# EAGLE board logic (EAGLE 9.6.2)
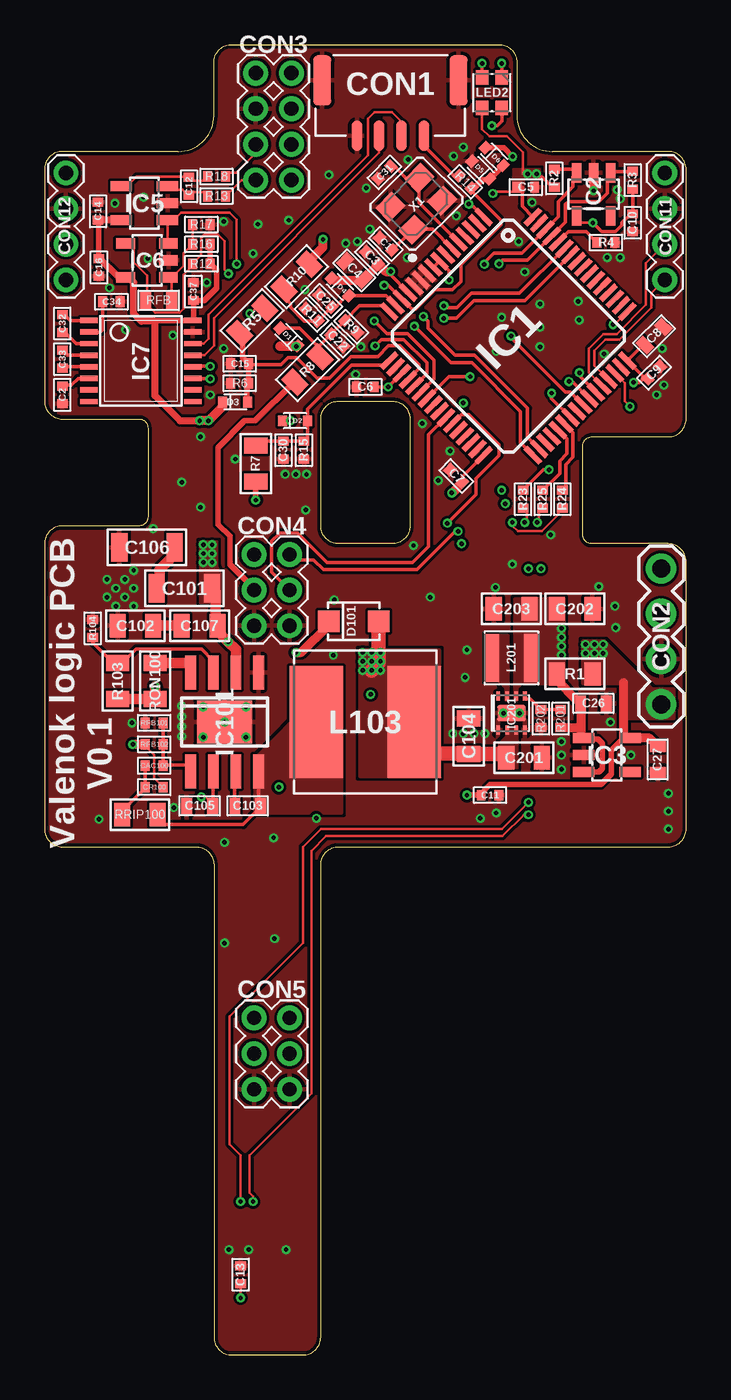
[diagram p0: board, top side]
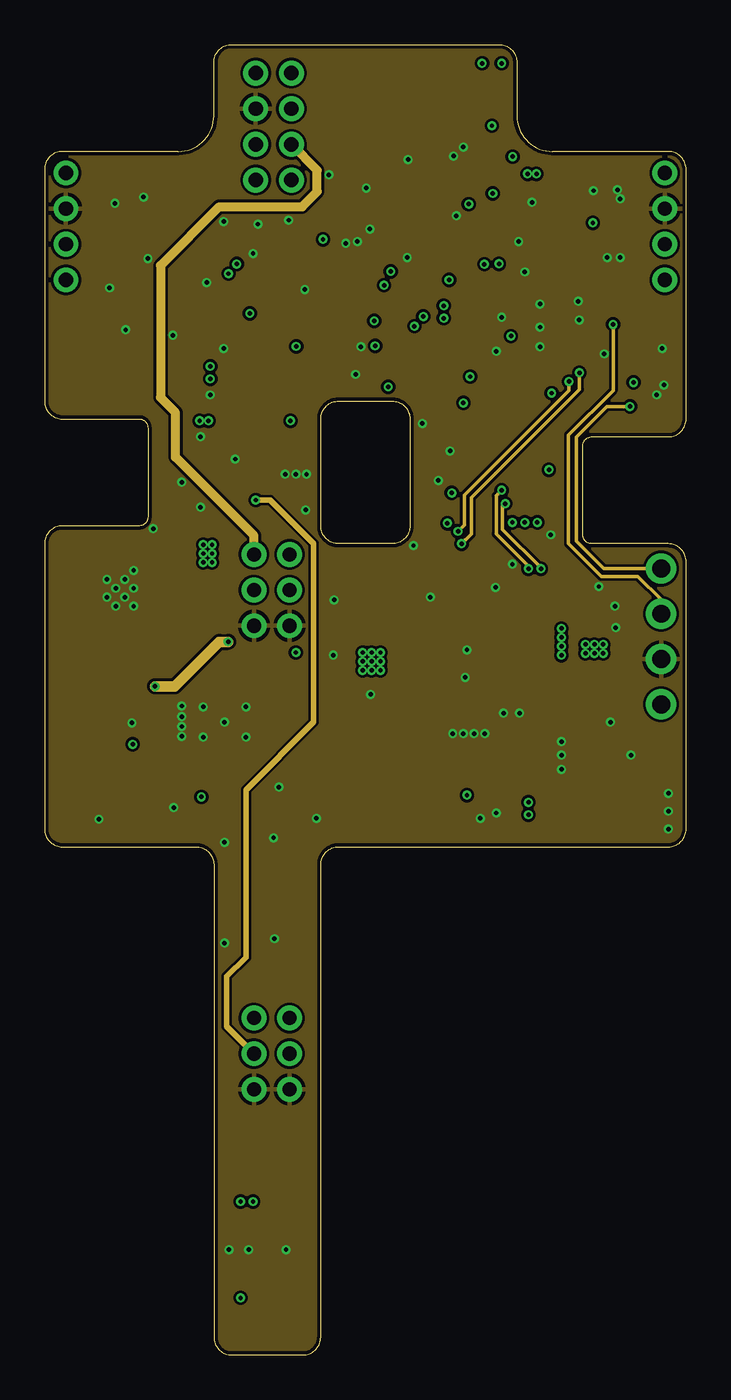
[diagram p1: board, inner layer GND]
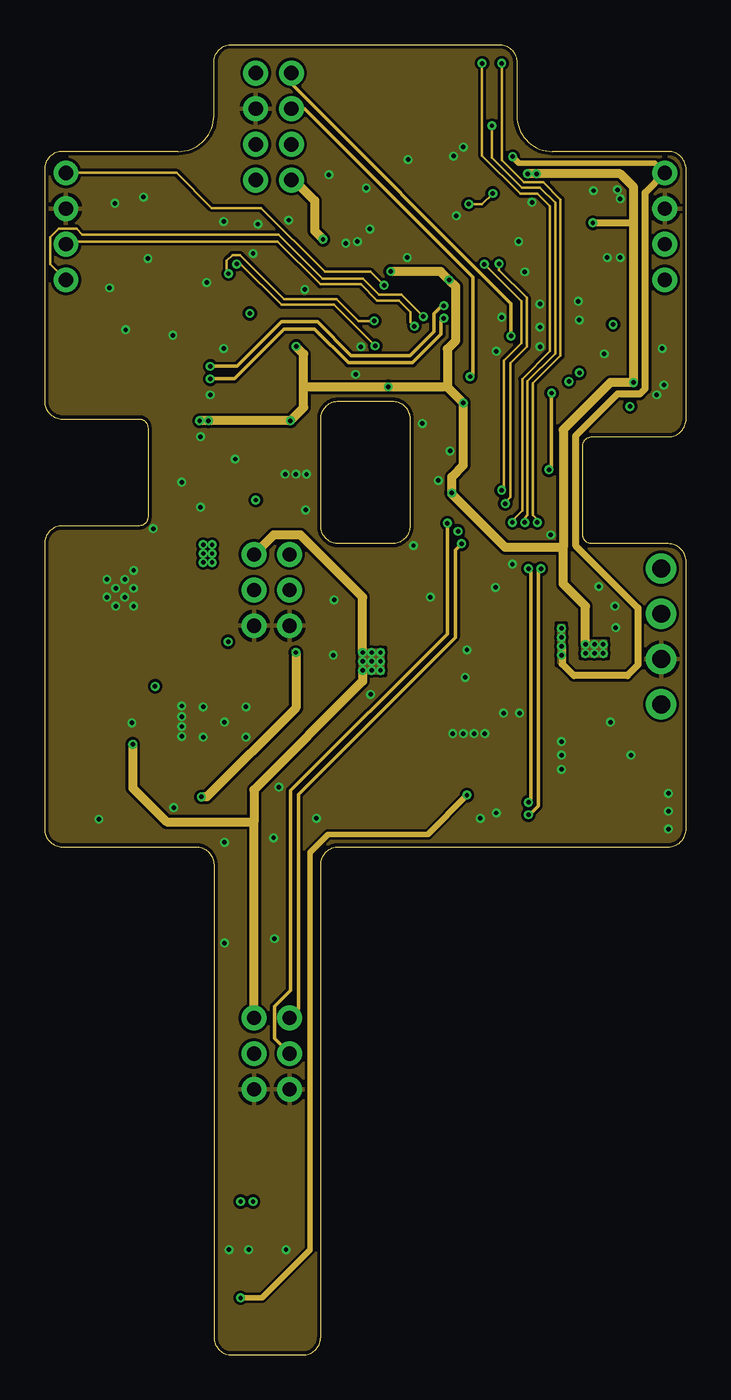
[diagram p2: board, inner layer PWR]
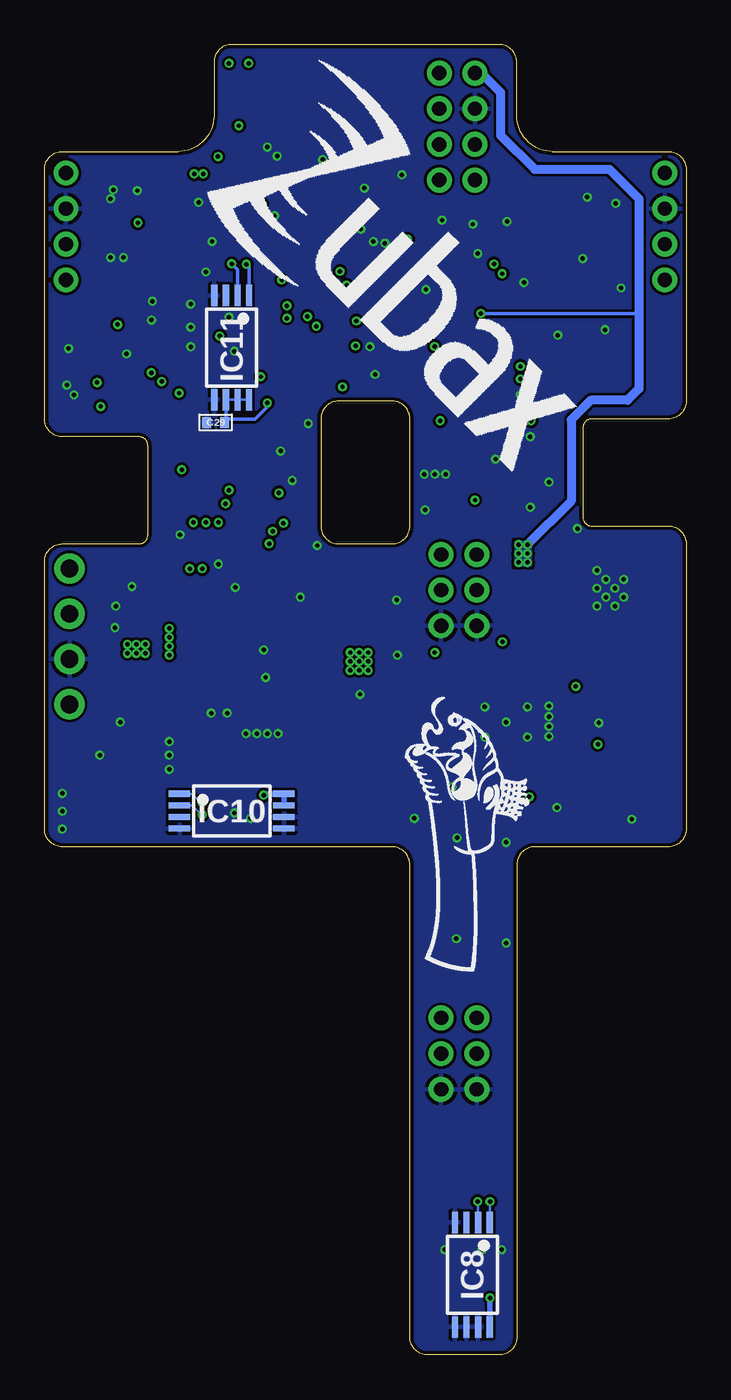
[diagram p3: board, bottom side, seen from below]

Size 36 x 73.5 mm. Coordinates in mm from the lower left corner, seen from the top.
Outline: 9.5,69.5 9.5,72.5 arc-90 10.5,73.5 25.5,73.5 arc-90 26.5,72.5 26.5,69.5 arc90 28.5,67.5 35,67.5 arc-90 36,66.5 36,52.5 arc-90 35,51.5 30.7,51.5 arc90 30.2,51 30.2,46 arc90 30.7,45.5 35,45.5 arc-90 36,44.5 36,29.5 arc-90 35,28.5 16.5,28.5 arc90 15.5,27.5 15.5,1 arc-90 14.5,0 10.5,0 arc-90 9.5,1 9.5,27.5 arc90 8.5,28.5 1,28.5 arc-90 0,29.5 0,45.5 arc-90 1,46.5 5.3,46.5 arc90 5.8,47 5.8,52 arc90 5.3,52.5 1,52.5 arc-90 0,53.5 0,66.5 arc-90 1,67.5 7.5,67.5 arc90 9.5,69.5
Outline: 16.5,53.5 19.5,53.5 arc-90 20.5,52.5 20.5,46.5 arc-90 19.5,45.5 16.5,45.5 arc-90 15.5,46.5 15.5,52.5 arc-90 16.5,53.5
Copper layers (1+2*15+16): Top 0.035mm / dielectric 0.2mm / GND 0.0175mm / dielectric 0.465mm / PWR 0.0175mm / dielectric 0.2mm / Bottom 0.035mm
Design rules "logicpcb": minimum track width 0.15mm, minimum drill 0.2mm, track to track 0.15mm, track to pad 0.15mm, pad to pad 0.15mm, via to via 0.15mm, smd to smd 0.15mm, copper to edge 0.2mm, drill to drill 0.2mm, minimum pad ring 0.125mm, minimum via ring 0.125mm, stop-mask expansion 1mil, vias tented up to drill 0.31mm, thermal gap 8mil
Net classes: 1 HV: clearance 0.5 mm

## Footprints (pad centres in the part's own frame; a part is rotated, then mirrored left to right if it is on the bottom)
C0402 = smd 0.5 x 0.6: 1 -0.5,0; 2 0.5,0
C0603 = smd 0.6 x 0.9: 1 -0.725,0; 2 0.725,0
C1206 = smd 0.9 x 1.6: P$1 -1.55,0; P$2 1.55,0
C0805 = smd 0.9 x 1.3: 1 -1,0; 2 1,0
JST_GH-4P-RA = smd 0.6 x 1.7: 1 1.875,-2.91; 2 0.625,-2.91; 3 -0.625,-2.91; 4 -1.875,-2.91 | smd 1 x 2.8: M$0 -3.825,0.19; M$1 3.825,0.19
1X04-PTH-2.54 = drill 1 pad 1.7: 1 -3.81,0; 2 -1.27,0; 3 1.27,0; 4 3.81,0
2X04-PTH-2 = drill 0.8 pad 1.4: 1 -1,3; 2 1,3; 3 -1,1; 4 1,1; 5 -1,-1; 6 1,-1; 7 -1,-3; 8 1,-3
2X03-PTH-2 = drill 0.8 pad 1.4: 1 -1,2; 2 1,2; 3 -1,0; 4 1,0; 5 -1,-2; 6 1,-2
1X04-PTH-2 = drill 0.8 pad 1.4: 1 -3,0; 2 -1,0; 3 1,0; 4 3,0
SOD523 = smd 0.5 x 0.6: A 0.7,0; C -0.7,0
SOD123F = smd 1.2 x 1.2: A 1.4,0; C -1.4,0
TQFP64 = smd 0.3 x 1.2: 1 -3.75,-5.7; 2 -3.25,-5.7; 3 -2.75,-5.7; 4 -2.25,-5.7; 5 -1.75,-5.7; 6 -1.25,-5.7; 7 -0.75,-5.7; 8 -0.25,-5.7; 9 0.25,-5.7; 10 0.75,-5.7; 11 1.25,-5.7; 12 1.75,-5.7; 13 2.25,-5.7; 14 2.75,-5.7; 15 3.25,-5.7; 16 3.75,-5.7; 33 3.75,5.7; 34 3.25,5.7; 35 2.75,5.7; 36 2.25,5.7; 37 1.75,5.7; 38 1.25,5.7; 39 0.75,5.7; 40 0.25,5.7; 41 -0.25,5.7; 42 -0.75,5.7; 43 -1.25,5.7; 44 -1.75,5.7; 45 -2.25,5.7; 46 -2.75,5.7; 47 -3.25,5.7; 48 -3.75,5.7 | smd 1.2 x 0.3: 17 5.7,-3.75; 18 5.7,-3.25; 19 5.7,-2.75; 20 5.7,-2.25; 21 5.7,-1.75; 22 5.7,-1.25; 23 5.7,-0.75; 24 5.7,-0.25; 25 5.7,0.25; 26 5.7,0.75; 27 5.7,1.25; 28 5.7,1.75; 29 5.7,2.25; 30 5.7,2.75; 31 5.7,3.25; 32 5.7,3.75; 49 -5.7,3.75; 50 -5.7,3.25; 51 -5.7,2.75; 52 -5.7,2.25; 53 -5.7,1.75; 54 -5.7,1.25; 55 -5.7,0.75; 56 -5.7,0.25; 57 -5.7,-0.25; 58 -5.7,-0.75; 59 -5.7,-1.25; 60 -5.7,-1.75; 61 -5.7,-2.25; 62 -5.7,-2.75; 63 -5.7,-3.25; 64 -5.7,-3.75
SOT23-5L = smd 1.1 x 0.6: 1 1.2,-0.95; 2 1.2,0; 3 1.2,0.95; 4 -1.2,0.95; 5 -1.2,-0.95
SOT23-5 = smd 1.2 x 0.55: 1 1.3,-0.95; 2 1.3,0; 3 1.3,0.95; 4 -1.3,0.95; 5 -1.3,-0.95
TSSOP16 = smd 0.305 x 0.991: 1 -2.275,-2.918; 2 -1.625,-2.918; 3 -0.975,-2.918; 4 -0.325,-2.918; 5 0.325,-2.918; 6 0.975,-2.918; 7 1.625,-2.918; 8 2.275,-2.918; 9 2.275,2.918; 10 1.625,2.918; 11 0.975,2.918; 12 0.325,2.918; 13 -0.325,2.918; 14 -0.975,2.918; 15 -1.625,2.918; 16 -2.275,2.918
TSSOP8 = smd 1.2 x 0.35: 1 -2.925,0.975; 2 -2.925,0.325; 3 -2.925,-0.325; 4 -2.925,-0.975; 5 2.925,-0.975; 6 2.925,-0.325; 7 2.925,0.325; 8 2.925,0.975
SOIC8-POWERPAD = smd 0.6 x 1.9: 1 -1.905,-2.78; 2 -0.635,-2.78; 3 0.635,-2.78; 4 1.905,-2.78; 5 1.905,2.78; 6 0.635,2.78; 7 -0.635,2.78; 8 -1.905,2.78 | smd 3.1 x 2.4: P$1 0,0
WFDFN-8 = smd 0.5 x 0.25: 1 -0.95,0.75; 2 -0.95,0.25; 3 -0.95,-0.25; 4 -0.95,-0.75; 5 0.95,-0.75; 6 0.95,-0.25; 7 0.95,0.25; 8 0.95,0.75 | smd 0.9 x 1.6: EP 0,0
HPC8040NF = smd 3 x 6.3: 1 -2.75,0; 2 2.75,0
NR3015 = smd 0.8 x 2.7: 1 -1.1,0; 2 1.1,0
LED2020 = smd 0.8 x 0.7: + 0.85,-0.55; B 0.85,0.55; G -0.85,-0.55; R -0.85,0.55
R0805 = smd 0.9 x 1.3: 1 -1,0; 2 1,0
R0402 = smd 0.5 x 0.6: 1 -0.5,0; 2 0.5,0
R0603 = smd 0.6 x 0.9: 1 -0.725,0; 2 0.725,0
OSCILLATOR-3.2X2.5-4P = smd 1.3 x 1.1: 1 -1.15,-0.9; 2 1.15,-0.9; 3 1.15,0.9; 4 -1.15,0.9

## Placement (x,y rotation side)
C1  9pF  [C0402]  19.15,62.32 315 top
C2  0.1µF  [C0402]  1,53.85 270 top
C3  10nF  [C0402]  18.37,61.54 315 top
C4  1µF  [C0603]  17.38,60.83 315 top
C5  0.1µF  [C0402]  27,65.5 180 top
C6  0.1µF  [C0402]  18,54.3 0 top
C7  0.1µF  [C0402]  23.1,49.3 315 top
C8  4.7µF  [C0603]  34.2,57.15 45 top
C9  0.1µF  [C0402]  34.2,55.1 45 top
C10  0.1µF  [C0402]  33,63.5 270 top
C11  0.1µF  [C0402]  25,31.4 0 top
C12  1000pF  [C0402]  8.1,65.55 90 top
C13  0.1µF  [C0402]  11,4.5 90 top
C14  0.1µF  [C0402]  3,64.15 90 top
C15  4700pF  [C0402]  10.95,55.6 0 top
C16  0.1µF  [C0402]  3.05,61 90 top
C22  4700pF  [C0402]  16.43,56.9 135 top
C25  4700pF  [C0402]  15.76,59.12 315 top
C26  1µF  [C0603]  30.8,36.55 180 top
C27  4.7µF  [C0603]  34.4,33.4 90 top
C29  0.1µF  [C0402]  26.4,52.3 180 bottom
C30  4700pF  [C0402]  13.4,50.75 90 top
C31  9pF  [C0402]  19.07,66.33 45 top
C32  0.1µF  [C0402]  1,57.85 270 top
C33  0.1µF  [C0402]  1,55.85 90 top
C34  0.1µF  [C0402]  3.75,59.08 0 top
C37  0.1µF  [C0402]  8.35,59.65 270 top
C101  4.7µF  [C1206]  7.85,43 0 top
C102  1µF  [C0805]  5.1,40.9 0 top
C103  0.01uF  [C0603]  11.4,30.8 0 top
C104  10uF  [C0805]  23.8,34.7 270 top
C105  1µF  [C0603]  8.7,30.8 0 top
C106  4.7µF  [C1206]  5.75,45.3 0 top
C107  1µF  [C0805]  8.7,40.9 0 top
C201  10uF  [C0805]  26.9,33.5 180 top
C202  10uF  [C0805]  29.75,41.85 180 top
C203  10uF  [C0805]  26.2,41.85 0 top
CAC100  0.1uF  [C0402]  6.15,33.05 180 top
CON1  CON-4P-TABS-JST_GH-RA  [JST_GH-4P-RA]  19.4,71.3 0 top
CON2  PINHEAD_1X04-2.54  [1X04-PTH-2.54]  34.6,40.3 270 top
CON3  PINHEAD_2X04-PLS-2  [2X04-PTH-2]  12.85,68.9 0 top
CON4  PINHEAD_2X03-PTH-2  [2X03-PTH-2]  12.75,42.9 0 top
CON5  PINHEAD_2X03-PTH-2  [2X03-PTH-2]  12.75,16.9 0 top
CON11  PINHEAD_1X04-2  [1X04-PTH-2]  34.8,63.3 270 top
CON12  PINHEAD_1X04-2  [1X04-PTH-2]  1.2,63.3 270 top
CR100  3300pF  [C0402]  6.15,31.85 180 top
D1  BAT54KFILM  [SOD523]  13.7,57.1 135 top
D2  BAT54KFILM  [SOD523]  14.05,52.4 0 top
D3  BAT54KFILM  [SOD523]  10.7,53.45 0 top
D4  BAT54KFILM  [SOD523]  16.58,59.91 315 top
D5  BAT54KFILM  [SOD523]  24.48,66.46 135 top
D6  BAT54KFILM  [SOD523]  25.24,67.22 315 top
D101  PMEG4020  [SOD123F]  17.35,41.15 0 top
IC1  STM32F105RCT6  [TQFP64]  26.02,57.15 225 top
IC2  CAT24C02  [SOT23-5L]  30.8,65.1 90 top
IC3  AP2127-3.3  [SOT23-5]  31.55,33.65 180 top
IC5  INA180A2  [SOT23-5]  5.6,64.6 0 top
IC6  LMV331  [SOT23-5L]  5.75,61.4 0 top
IC7  ST3232  [TSSOP16]  5.4,55.75 270 top
IC8  LM75-TSSOP8  [TSSOP8]  12,4.5 270 bottom
IC10  LM75-TSSOP8  [TSSOP8]  25.5,30.5 0 bottom
IC11  LM75-TSSOP8  [TSSOP8]  25.5,56.5 270 bottom
IC101  LM5017  [SOIC8-POWERPAD]  10.1,35.5 180 top
IC201  TPS62160QDSGRQ1  [WFDFN-8]  26.2,36 90 top
L103  120µH  [HPC8040NF]  18,35.5 0 top
L201  2.2µH  [NR3015]  26.2,39.1 0 top
LED2  LED_RGB-2020  [LED2020]  25.1,70.8 270 top
R1  DNM  [R0805]  29.75,38.2 0 top
R2  3K9  [R0402]  28.6,66 90 top
R3  3K9  [R0402]  33,65.9 90 top
R4  3K9  [R0402]  31.5,62.4 180 top
R5  110K  [R0805]  11.64,58.01 45 top
R6  3K3  [R0402]  10.95,54.5 0 top
R7  51K  [R0805]  11.85,50 90 top
R8  51K  [R0805]  14.75,55.27 45 top
R9  1K8  [R0402]  17.21,57.67 135 top
R10  51K  [R0805]  14.14,60.48 225 top
R11  1K8  [R0402]  14.98,58.35 315 top
R12  5K6  [R0402]  8.8,61.2 180 top
R13  000  [R0402]  9.65,65 0 top
R14  200R  [R0402]  23.6,65.8 315 top
R15  1K8  [R0402]  14.55,50.75 90 top
R16  3K3  [R0402]  8.8,62.3 0 top
R17  5K6  [R0402]  8.8,63.4 0 top
R18  000  [R0402]  9.65,66.1 0 top
R23  200R  [R0402]  26.85,48 90 top
R24  200R  [R0402]  29.05,48 90 top
R25  200R  [R0402]  27.95,48 90 top
R103  127K  [R0805]  4.1,37.8 270 top
R104  14K  [R0402]  2.7,40.75 270 top
R201  51K  [R0402]  28.95,35.7 270 top
R202  10K  [R0402]  27.85,35.7 90 top
RFB  DNM  [R0603]  6.4,59.15 0 top
RFB101  1K  [R0402]  6.15,35.45 0 top
RFB102  10K  [R0402]  6.15,34.25 180 top
RON100  110K  [R0805]  6.2,37.8 90 top
RRIP100  110K  [R0805]  5.35,30.3 0 top
U$1  [DRAGON-15X6]  15.8,36.9 270 bottom
U$2  [ZUBAX_25X12]  28.6,65.45 315 bottom
X1  16MHz  [OSCILLATOR-3.2X2.5-4P]  20.86,64.57 45 top

## Library data of the parts
C1 C31 = rc; DIGIKEY#: 1276-1617-1-ND; LCSC#: C111805; MANF: Samsung Electro-Mechanics; MANF#: CL05C090DB5NNNC; OPERATING_TEMP: -55°C ~ 125°C; PACKAGE: 0402; VOLTAGE: 50V
C2 C5-C7 C9-C11 C13 C14 C16 C29 C32-C34 C37 CAC100 = rc; AEC-Q: ---; DIGIKEY#: 490-3261-1-ND; MANF: Murata Electronics; MANF#: GRM155R71C104KA88D; OPERATING_TEMP: -55°C ~ 125°C; PACKAGE: 0402; VOLTAGE: 16V
C3 = rc; AEC-Q: ---; DIGIKEY#: 490-6043-1-ND; MANF: Murata Electronics; MANF#: GCM155R71E103KA37D; OPERATING_TEMP: -55°C ~ 125°C; PACKAGE: 0402; VOLTAGE: 25V
C4 C26 C105 = rc; AEC-Q: AEC-Q200; DIGIKEY#: 445-12539-1-ND; MANF: TDK Corporation; MANF#: CGA3E1X7R1C105K080AC; OPERATING_TEMP: -55°C ~ 125°C; PACKAGE: 0603; VOLTAGE: 16V
C8 C27 = rc; AEC-Q: ---; DIGIKEY#: 1276-2087-1-ND; MANF: Samsung Electro-Mechanics; MANF#: CL10B475KQ8NQNC; OPERATING_TEMP: -55°C ~ 125°C; PACKAGE: 0603; VOLTAGE: 6.3V
C12 = rc; DIGIKEY#: 1276-1032-1-ND; MANF: Samsung Electro-Mechanics; MANF#: CL05B102KB5NNNC; OPERATING_TEMP: -55°C ~ 125°C; PACKAGE: 0402; VOLTAGE: 50V
C15 C22 C25 C30 = rc; DIGIKEY#: 1276-1125-1-ND; LCSC#: C1538; MANF: Samsung Electro-Mechanics; MANF#: CL05B472KB5NNNC; OPERATING_TEMP: -55°C ~ 125°C; PACKAGE: 0402; VOLTAGE: 50V
C101 C106 = rc; DIGIKEY#: 1276-3057-1-ND; LCSC#: C29823; MANF: Samsung Electro-Mechanics; MANF#: CL31A475KBHNNNE; OPERATING_TEMP: -55°C ~ 85°C; PACKAGE: 1206; VOLTAGE: 50V
C102 = rc; DIGIKEY#: 1276-2396-1-ND; LCSC#: C28323; MANF: Samsung Electro-Mechanics; MANF#: CL21A105KBCLNNC; OPERATING_TEMP: -55°C ~ 125°C; PACKAGE: 0805; VOLTAGE: 50V
C103 = rc; DIGIKEY#: 1276-1009-1-ND; MANF: Samsung Electro-Mechanics; MANF#: CL10B103KB8NNNC; OPERATING_TEMP: -55°C ~ 125°C; PACKAGE: 0603; VOLTAGE: 50V
C104 C201-C203 = rc; AEC-Q: AEC-Q200; DIGIKEY#: 445-181411-1-ND; MANF: TDK Corporation; MANF#: CGA4J1X7S1E106K125AE; OPERATING_TEMP: -55°C ~ 125°C; PACKAGE: 0805; VOLTAGE: 25V
C107 = rc; DIGIKEY#: 1276-2396-1-ND; LCSC#: C28323; MANF: Samsung Electro-Mechanics; MANF#: CL21A105KBCLNNC; OPERATING_TEMP: -55°C ~ 85°C; PACKAGE: 0805; VOLTAGE: 50V
CON1 = Connectors; DIGIKEY#: 455-1566-1-ND; MANF: JST Sales America Inc; MANF#: SM04B-GHS-TB(LF)(SN)
CON2-CON5 CON11 CON12 = pinhead
CR100 = rc; DIGIKEY#: 1276-1552-1-ND; MANF: Samsung Electro-Mechanics; MANF#: CL05B332KB5NNNC; OPERATING_TEMP: -55°C ~ 125°C; PACKAGE: 0402; VOLTAGE: 50V
D1-D6 = Diodes; DIGIKEY#: STMicroelectronics; LCSC#: C283259; MANF: STMicroelectronics; MANF#: BAT54KFILM
D101 = Diodes; DIGIKEY#: 1727-5385-2-ND; IF: 2A; LCSC#: C8598; MANF: NXP Semiconductors; MANF#: PMEG4020ER,115; VOLTAGE: 40V
IC1 = stm32; DIGIKEY#: 497-11547-ND; LCSC#: C8345; MANF: STMicroelectronics; MANF#: STM32F105RCT7; OPERATING_TEMP: -40°C ~ 105°C (TA)
IC2 = misc; DIGIKEY#: CAT24C02TDI-GT3AOSCT-ND; LCSC#: C81340; MANF: ON Semiconductor; MANF#: CAT24C02TDI-GT3A
IC3 = linear regulators; DIGIKEY#: AP2127K-3.3TRG1DITR-ND; I_MAX: 300mA; LCSC#: C156285; MANF: Diodes Incorporated; MANF#: AP2127K-3.3TRG1; V_MAX: 6V
IC5 = misc; DIGIKEY#: 296-47653-1-ND; GAIN: 50V/V; LCSC#: C192764; MANF: Texas Instruments; MANF#: INA180A2IDBVR
IC6 = misc; DIGIKEY#: LMV331M5/NOPBCT-ND; LCSC#: C108095; MANF: 3PEAK; MANF#: LMV331TP-TR
IC7 = serial_interfaces; DIGIKEY#: 497-6534-1-ND; LCSC#: C435947; MANF: STMicroelectronics; MANF#: ST3232BTR
IC8 IC10 IC11 = misc; DIGIKEY#: 568-4768-1-ND; LCSC#: C33099; MANF: NXP Semiconductors; MANF#: LM75BDP,118
IC101 = dc-dc; DIGIKEY#: 296-37695-1-ND; DIGIREEL#: 296-37695-6-ND; LCSC#: C34355; MANF: Texas Instruments; MANF#: LM5017MRE/NOPB
IC201 = dc-dc; AEC-Q: AEC-Q100; DIGIKEY#: 296-40840-1-ND; LCSC#: C324077; MANF: Texas Instruments; MANF#: TPS62160QDSGRQ1
L103 = power_inductors; CURRENT: 1A; DCR: 350mΩ; HEIGHT: 3.7mm; LCSC#: C357080; MANF: TAI-TECH; MANF#: HPC8040NF-121M
L201 = power_inductors; AEC-Q: AEC-Q200; CURRENT: 1.5A; DIGIKEY#: 587-3561-1-ND; HEIGHT: 1.5mm; MANF: Taiyo Yuden; MANF#: NRS3015T2R2MNGHV
LED2 = rc; LCSC#: C108793; MANF: Foshan NationStar Optoelectronics; MANF#: FM-B2020RGBA-HG
R1 = rc; PACKAGE: 0805; TOLERANCE: 1%
R2-R4 R6 R16 = rc; AEC-Q: ---; DIGIKEY#: 311-3.90KLRCT-ND; MANF: Yageo; MANF#: RC0402FR-073K9L; OPERATING_TEMP: -55°C ~ 155°C; PACKAGE: 0402; TOLERANCE: 1%
R5 RON100 RRIP100 = rc; DIGIKEY#: 311-110KCRCT-ND; MANF: Yageo; MANF#: RC0805FR-07110KL; OPERATING_TEMP: -55°C ~ 155°C; PACKAGE: 0805; TOLERANCE: 1%
R7 R8 R10 = rc; DIGIKEY#: 13-RT0805FRE0751KLCT-ND; LCSC#: C25794; MANF: Yageo; MANF#: RT0805FRE0751KL; OPERATING_TEMP: -55°C ~ 155°C; PACKAGE: 0805; TOLERANCE: 1%
R9 R11 R15 = rc; DIGIKEY#: 311-1.80KLRCT-ND; LCSC#: C25871; MANF: Yageo; MANF#: RC0402FR-071K8L; OPERATING_TEMP: -55°C ~ 155°C; PACKAGE: 0402; TOLERANCE: 1%
R12 R17 = rc; AEC-Q: ---; DIGIKEY#: 13-RT0402FRE075K6LCT-ND; MANF: Yageo; MANF#: RT0402FRE075K6L; OPERATING_TEMP: -55°C ~ 155°C; PACKAGE: 0402; TOLERANCE: 1%
R13 R18 = rc; DIGIKEY#: 13-RC0402JR-130RLCT-ND; MANF: Yageo; MANF#: RC0402JR-130RL; OPERATING_TEMP: -55°C ~ 155°C; PACKAGE: 0402; TOLERANCE: 1%
R14 R23-R25 = rc; AEC-Q: ---; DIGIKEY#: 311-200JRCT-ND; MANF: Yageo; MANF#: RC0402JR-07200RL; OPERATING_TEMP: -55°C ~ 155°C; PACKAGE: 0402; TOLERANCE: 1%
R103 = rc; DIGIKEY#: 311-127KCRCT-ND; MANF: Yageo; MANF#: RC0805FR-07127KL; OPERATING_TEMP: -55°C ~ 155°C; PACKAGE: 0805; TOLERANCE: 1%
R104 = rc; DIGIKEY#: 311-14.0KLRCT-ND; MANF: Yageo; MANF#: RC0402FR-0714KL; PACKAGE: 0402; TOLERANCE: 1%
R201 = rc; AEC-Q: AEC-Q200; DIGIKEY#: 13-RT0805FRE0751KLCT-ND; MANF: Yageo; MANF#: RT0805FRE0751KL; PACKAGE: 0402; TOLERANCE: 1%
R202 = rc; AEC-Q: AEC-Q200; DIGIKEY#: P10.0KLCT-ND; MANF: Panasonic Electronic Components; MANF#: ERJ-2RKF1002X; PACKAGE: 0402; TOLERANCE: 1%
RFB = rc; AEC-Q: ---; DIGIKEY#: 311-3.90KLRCT-ND; MANF: Yageo; MANF#: RC0402FR-073K9L; OPERATING_TEMP: -55°C ~ 155°C; PACKAGE: 0603; TOLERANCE: 1%
RFB101 = rc; DIGIKEY#: YAG1234CT-ND; MANF: Yageo; MANF#: RT0402FRE071KL; OPERATING_TEMP: -55°C ~ 155°C; PACKAGE: 0402; TOLERANCE: 1%
RFB102 = rc; DIGIKEY#: P10.0KLCT-ND; MANF: Panasonic Electronic Components; MANF#: ERJ-2RKF1002X; OPERATING_TEMP: -55°C ~ 155°C; PACKAGE: 0402; TOLERANCE: 1%
U$1 U$2 = logo
X1 = crystal; DIGIKEY#: SER4372CT-ND; ESR: 60Ω; LOAD_CAPACITANCE: 9pF; LSCSC#: C13738; MANF: EPSON; MANF#: TSX-3225 16.0000MF18X-AC6

## Nets
BOOT0: IC1.60 R4.2
CAN1_RX: CON11.3 IC1.44
CAN1_TX: CON11.4 IC1.45
CAN2_RX: CON12.3 IC1.33
CAN2_TX: CON12.4 IC1.34
CS+: C12.1 IC5.3 R13.1
CS-: C12.2 IC5.4 R18.1
CURRENT_AMP_OUT: IC1.21 IC5.1 IC6.3
FET_A_H: CON3.2 IC1.41
FET_A_L: CON3.4 IC1.23
FET_B_H: CON4.2 IC1.42
FET_B_L: CON4.4 IC1.26
FET_C_H: CON5.2 IC1.43
FET_C_L: CON5.4 IC1.27
GND: C1.1 C2.2 C3.1 C4.1 C5.1 C6.1 C7.1 C8.2 C9.2 C10.2 C11.2 C13.2 C14.2 C15.1 C16.1 C22.1 C25.1 C26.1 C27.1 C29.2 C30.1 C31.1 C34.2 C37.1 C102.1 C104.1 C105.1 C106.P$1 C201.1 C202.1 C203.1 CON1.4 CON1.M$0 CON1.M$1 CON2.3 CON3.3 CON4.5 CON4.6 CON5.5 CON5.6 CON11.2 CON12.2 D5.A IC1.10 IC1.11 IC1.12 IC1.18 IC1.31 IC1.47 IC1.63 IC2.2 IC3.2 IC5.2 IC6.2 IC7.15 IC8.4 IC8.5 IC8.6 IC8.7 IC10.4 IC10.5 IC10.6 IC11.4 IC11.5 IC101.1 IC101.P$1 IC201.1 IC201.4 IC201.EP R4.1 R6.1 R9.1 R11.1 R15.1 R17.2 R104.1 R202.1 RFB101.1 X1.2 X1.4
HV_DC-DC(LM5017):N$1 [HV]: C101.P$1 C106.P$2
HV_DC-DC(LM5017):N$2: C103.2 IC101.8 L103.1 RRIP100.2
HV_DC-DC(LM5017):N$3: CAC100.2 CR100.2 RRIP100.1
HV_DC-DC(LM5017):N$4 [HV]: C102.2 C107.1
HV_DC-DC(LM5017):N$10: C105.2 D101.C IC101.6
HV_DC-DC(LM5017):N$11: IC101.4 RON100.2
HV_DC-DC(LM5017):N$12: C103.1 IC101.7
HV_DC-DC(LM5017):N$14: CAC100.1 IC101.5 RFB101.2 RFB102.1
HV_DC-DC(LM5017):N$17: IC101.3 R103.1 R104.2
I2C_SCL: IC1.61 IC2.1 IC8.2 IC10.2 IC11.2 R3.2
I2C_SDA: IC1.62 IC2.3 IC8.1 IC10.1 IC11.1 R2.2
LV_DC-DC:FB: IC201.5 R201.1 R202.2
LV_DC-DC:N$1: IC201.7 L201.1
N$1: CON3.7 R13.2
N$2: CON1.1 R14.1
N$3: IC1.37 R25.2
N$4: CON3.5 R18.2
N$6: LED2.B R23.1
N$7: LED2.R R25.1
N$12: IC1.38 R24.2
N$16: C31.2 IC1.5 X1.3
N$18: IC1.39 R23.2
N$19: C32.1 IC7.1
N$20: C32.2 IC7.3
N$21: C1.2 IC1.6 X1.1
N$22: C33.1 IC7.5
N$24: C33.2 IC7.4
N$26: LED2.G R24.1
N$27: C2.1 IC7.6
N$28: C34.1 IC7.2
N$29: CON1.3 IC7.13
N$30: CON1.2 IC7.14
OVERCURRENT_FAULT: IC1.22 IC6.4 R12.2 RFB.1
PHASE_A [HV]: CON3.8 R10.1
PHASE_B [HV]: CON4.3 R8.1
PHASE_C [HV]: CON5.3 R7.1
RC_PWM: CON12.1 D5.C D6.A IC1.14 R14.2
SENSE_A: C25.2 D4.A IC1.15 R10.2 R11.2
SENSE_B: C22.2 D1.A IC1.16 R8.2 R9.2
SENSE_C: C30.2 D2.A IC1.17 R7.2 R15.2
SENSE_VIN: C15.2 D3.A IC1.20 R5.1 R6.2
SWCLK: CON2.2 IC1.49
SWDIO: CON2.1 IC1.46
USART1_RX: IC1.59 IC7.12
USART1_TX: IC1.58 IC7.11
VDC [HV]: C101.P$2 C107.2 CON3.1 IC101.2 R5.2 R103.2 RON100.1
VDD_3V3: C3.2 C4.2 C5.2 C6.2 C7.2 C8.1 C9.1 C10.1 C11.1 C13.1 C14.1 C16.2 C27.2 C29.1 C37.2 CON2.4 D1.C D2.C D3.C D4.C IC1.1 IC1.8 IC1.9 IC1.13 IC1.19 IC1.32 IC1.48 IC1.64 IC2.4 IC3.5 IC5.5 IC6.5 IC7.16 IC8.8 IC10.7 IC10.8 IC11.6 IC11.7 IC11.8 LED2.+ R1.2 R2.1 R3.1 R12.1 R16.2
VDD_5V: C26.2 C202.2 C203.2 CON11.1 D6.C IC3.1 IC3.3 IC201.6 L201.2 R1.1 R201.2
VDD_12V: C104.2 C201.2 CON3.6 CON4.1 CON5.1 CR100.1 D101.A IC201.2 IC201.3 L103.2 RFB102.2
VREF: IC6.1 R16.1 R17.1 RFB.2

## Tracks (layer width: path | path; a pad name or v marks a point on that pad's centre or on a via)
BOOT0
  Top 0.2: R4.2 30.4,63 29.4,63 IC1.60
CAN1_RX
  Top 0.15: IC1.44 30.55,55.09 30.55,56.45 31.35,57.25 32.1,57.25 33.75,58.9 33.75,61.25 CON11.3
CAN1_TX
  Top 0.15: IC1.45 30.85,55.5 30.85,56.33 31.47,56.95 32.25,56.95 34.05,58.75 34.05,59.55 CON11.4
CAN2_RX  (via drill 0.25 pad 0.5)
  Top 0.2: IC1.33 26.7,51.16 26.7,52.92 23.97,55.65 22.8,55.65 v20.75,57.7
  PWR 0.15: v20.75,57.7 20.52,57.93 20.52,58.5 19.88,59.15 18.65,59.15 17.75,60.05 15.47,60.05 13.07,62.45 1.35,62.45 CON12.3
CAN2_TX  (via drill 0.25 pad 0.5)
  Top 0.2: IC1.34 27.1,51.47 27.1,53.1 24.12,56.08 23.02,56.08 21.5,57.6 21.5,58 v21.25,58.25
  PWR 0.15: v21.25,58.25 20.02,59.47 18.77,59.47 17.88,60.38 15.6,60.38 13.12,62.85 2.12,62.85 1.8,63.17 0.8,63.17 0.32,62.7 0.32,61.17 CON12.4
CS+
  Top 0.152: R13.1 9.15,65.17 9.1,65.22 8.1,65.22 C12.1 8.05,65.05 7.75,65.35 7.1,65.35 IC5.3
CS-
  Top 0.152: R18.1 9.15,65.95 9.07,65.88 8.28,65.88 C12.2 8.05,66.1 5.15,66.1 4.61,65.55 IC5.4
CURRENT_AMP_OUT  (via drill 0.25, 0.25 pad 0.5)
  Top 0.15: IC5.1 7.1,63.85 7.45,63.85 7.68,64.08 10.38,64.08 10.79,63.67 v10.79,61.19
  Top 0.152: IC5.1 6.9,62.4 IC6.3
  Top 0.2: IC1.21 21.45,55.05 21.45,55.65 20.15,56.95 18.9,56.95 v18.55,56.6
  PWR 0.15: v18.55,56.6 16.25,58.9 13.3,58.9 11.01,61.19 v10.79,61.19
FET_A_H  (via drill 0.25)
  Top 0.2: IC1.41 29.51,54.01 29.23,54.01 26.17,57.08 v26.17,57.15
  PWR 0.2: v26.17,57.15 26.17,58.98 13.85,71.3 CON3.2
FET_A_L  (via drill 0.25)
  Top 0.2: IC1.23 22.68,54.88 v23.88,54.88 | v23.88,54.88
  PWR 0.2: CON3.4 14.57,69.9 24.02,60.45 24.02,55.02 v23.88,54.88
FET_B_H  (via drill 0.25 pad 0.5)
  Top 0.2: CON4.2 14.05,44.6 15.1,44.6 15.65,44.05 20.9,44.05 23.05,46.2 v23.2,46.2 | IC1.42 29.63,54.6 v29.43,54.6
  GND 0.2: v23.2,46.2 23.55,46.55 23.55,48.23 29.43,54.1 v29.43,54.6
FET_B_L
  Top 0.2: IC1.26 21.55,51.62 21.55,45.35 20.65,44.45 15.85,44.45 14.2,46.1 13.2,46.1 12.75,45.65 12.75,43.9 CON4.4
FET_C_H  (via drill 0.25 pad 0.5)
  Top 0.2: IC1.43 30.01,54.92 v30.01,55.09
  GND 0.2: v23.4,45.5 23.6,45.7 23.61,45.7 23.95,46.04 23.95,48.1 30.01,54.16 v30.01,55.09
  PWR 0.2: CON5.2 14.25,19.4 14.25,31.45 23.05,40.25 23.05,45.15 v23.4,45.5
FET_C_L  (via drill 0.25 pad 0.5)
  Top 0.2: IC1.27 23.39,52.75 23.8,52.75 25.5,51.05 25.5,50.45 24.2,49.15 24.2,48.25 v22.6,46.65
  PWR 0.2: CON5.4 12.9,17.75 12.9,19.55 13.8,20.45 13.8,31.65 22.6,40.45 v22.6,46.65
GND  (via drill 0.25, 0.25 pad 0.5)
  Top 0.5: IC2.2 v30.8,65.31 v30.8,65.3
  other vias: 7.25,30.7 4.9,35.45 17.45,55 16.9,62.35 14.6,59.76 17.75,56.55 27.35,64.65 17.55,62.45 18.25,63.15 23.1,63.9 20.35,61.55 34.75,54.4 34.35,53.85 27.8,58.95 27.8,56.55 30,58.05 29.95,59.1 27.8,57.65 26.25,44.35 31.4,56.15 32.3,64.85 32.15,65.35 32.3,61.55 34.65,56.45 5.55,64.95 5.8,61.5 3.95,64.6 3.65,59.85 4.55,57.5 22.75,50.7 22.1,49.05 10.05,63.58 9.1,60.15 29,34.4 29,32.85 29,33.65 31.75,35.5 32.9,33.65 35,29.5 32,42 32.05,40.8 31.1,43.1 25.3,43.05 21.65,42.5 23.7,39.55 23.6,38 7.7,36.4 7.7,35.8 7.7,35.25 7.7,34.7 24.45,30.1 25.35,30.4 10.35,5.9 11.45,5.9 13.55,5.9 13.5,49.4 14.1,49.4 14.7,49.4 7.2,57.2 35,31.5 35,30.5 8.9,36.35 11.3,36.35 8.9,34.65 11.3,34.65 10.1,35.5 10.05,56.45 9.3,53.85 22.9,34.85 23.5,34.85 24.1,34.85 24.7,34.85 25.75,36 26.65,36 5,42 4.5,42.5 5,43 4.5,43.5 5,44 4,43 3.5,43.5 3.5,42.5 4,42 26.95,60.75 26.6,62.45 18.05,65.45 20.4,67.05 22.95,67.25 23.5,67.75 28.4,46 25.35,56.3 25.65,58.2 7.7,48.95 8.75,51.5 8.75,47.55 10.7,50.25 6.1,46.35 21.2,52.25 16.25,42.35 16.2,39.25 18.3,37.05 13.15,31.85 12.85,29 12.9,23.35 10.1,23.1 10.1,28.75 3.05,30.05 15.25,30.1 20.7,45.4 14.65,47.4 31.57,61.55 11.97,63.42 11.7,61.78 13.7,63.65 15.95,66.2
  pour Bottom (rank 3): 0,73.5 36,73.5 36,0 0,0
  pour Top (rank 2): 0,73.5 36,73.5 36,0 0,0
  pour GND (rank 3): 0,73.5 36,73.5 36,0 0,0
  pour PWR (rank 2): 0,73.5 36,73.5 36,0 0,0
HV_DC-DC(LM5017):N$1
  Top 0.6: C101.P$1 6.45,43.15 6.45,44.05 7.3,44.9 C106.P$2
HV_DC-DC(LM5017):N$2
  Top 0.2: RRIP100.2 6.12,30.23 6.6,29.75 11.15,29.75 12.12,30.73 C103.2 12,30.92 IC101.8
  pour Top (no thermals): 11.8,33.45 15.05,36.7 16.65,36.7 16.65,30.4 11.8,30.4
HV_DC-DC(LM5017):N$3
  Top 0.2: CAC100.2 CR100.2 5.65,31.8 4.35,30.5 RRIP100.1
HV_DC-DC(LM5017):N$4
  Top 0.6: C107.1 C102.2
HV_DC-DC(LM5017):N$10  (via drill 0.25)
  Top 0.15: C105.2 9.43,30.9 9.03,31.3 v8.8,31.3
  Top 0.2: IC101.6 9.46,30.84 C105.2
  Top 0.5: D101.C 15.95,40.95 14.4,39.4 v14.1,39.4
  PWR 0.5: v8.8,31.3 9.1,31.3 14.1,36.3 v14.1,39.4
HV_DC-DC(LM5017):N$11
  Top 0.6: IC101.4 8.2,38.78 8.18,38.8 RON100.2
HV_DC-DC(LM5017):N$12
  Top 0.2: C103.1 10.68,32.66 IC101.7
HV_DC-DC(LM5017):N$14
  Top 0.2: RFB101.2 RFB102.1 6.65,33.65 CAC100.1 6.7,33.1 8.2,33.1 IC101.5
HV_DC-DC(LM5017):N$17
  Top 0.2: IC101.3 9.46,38.94 8.8,39.6 5.15,39.6 4.35,38.8 R103.1 3.85,38.8 2.7,39.95 R104.2
I2C_SCL  (via drill 0.25 pad 0.5)
  Top 0.152: v11.7,8.6 11.7,8.9 11.5,9.1 11.5,11.2 14.97,14.67 14.97,28.27 15.8,29.1 25.7,29.1 26.9,30.3 v27.15,30.3
  Top 0.2: IC2.1 31.77,66.38 | R3.2 32.98,66.38 31.77,66.38 | 31.77,66.38 31.57,66.38 31.57,65.18 31.1,64.7 29.4,64.7 29.23,64.53 29.23,63.53 IC1.61 27.09,61.4 25.7,61.4 v25.5,61.2
  GND 0.2: v27.85,44.1 27.85,44.16 25.7,46.31 25.7,47.6 v25.85,47.75
  PWR 0.15: v25.5,61.2 25.5,60.85 27.05,59.3 27.05,56.55 26.12,55.62 26.12,48.12 25.85,47.85 v25.85,47.75
  PWR 0.2: v27.85,44.1 27.7,43.95 27.7,30.8 27.2,30.3 v27.15,30.3
  Bottom 0.152: IC8.2 11.68,8.57 v11.7,8.6 | IC10.2 27.73,30.83 27.2,30.3 v27.15,30.3
  Bottom 0.2: IC11.2 25.18,60.88 v25.5,61.2
I2C_SDA  (via drill 0.25 pad 0.5)
  Top 0.152: v11,8.6 11,11.2 10.38,11.82 10.38,18.98 14.5,23.1 14.5,28.5 15.5,29.5 25.65,29.5 v27.15,31
  Top 0.2: R2.2 29.7,66.5 29.85,66.35 IC2.3 29.65,66.1 29.65,65.52 28.84,64.7 28.84,63.83 28.12,63.12 IC1.62 26.78,61.8 25.2,61.8 24.68,61.28 v24.68,61.18
  GND 0.2: v27.15,44.1 27.15,44.25 25.35,46.05 25.35,48.2 v25.65,48.5
  PWR 0.15: v24.68,61.18 26.75,59.11 26.75,56.75 25.77,55.77 25.77,48.62 v25.65,48.5
  PWR 0.2: v27.15,44.1 27.3,43.95 27.3,31.15 v27.15,31
  Bottom 0.152: IC8.1 11.03,8.57 v11,8.6 | IC10.1 27.73,31.48 27.25,31 v27.15,31
  Bottom 0.2: IC11.1 24.52,61.03 v24.68,61.18
LV_DC-DC:FB
  Top 0.2: IC201.5 26.97,36.8 27.25,36.8 R202.2 R201.1
LV_DC-DC:N$1
  pour Top (no thermals): 25.9,36.75 25.9,37.4 25.45,37.85 24.8,37.85 24.8,40.35 26,40.35 26,36.75
N$1
  Top 0.152: CON3.7 11.05,65.9 R13.2
N$2
  Top 0.2: CON1.1 21.27,67.83 23.05,66.05 23.15,66.05 R14.1
N$3
  Top 0.2: IC1.37 29.3,51.39 29.3,50.55 28.9,50.15 28.9,49.7 28.9,49.45 R25.2
N$4
  Top 0.152: CON3.5 11.85,67.4 10.75,66.3 10.15,66.3 R18.2
N$6  (via drill 0.25)
  Top 0.15: v26.95,46.7 27.07,46.83 27.07,47.27 R23.1
  Top 0.2: LED2.B 25.65,69.2 25.4,68.95 v25.1,68.95
  PWR 0.15: v25.1,68.95 25.1,67.15 26.78,65.47 27.8,65.47 28.65,64.62 28.65,56.17 27.1,54.62 27.1,47.1 26.95,46.95 v26.95,46.7
N$7  (via drill 0.25, 0.25 pad 0.5)
  Top 0.15: R25.1 27.73,47.27 27.73,46.77 v27.65,46.7
  Top 0.2: LED2.R v25.65,72.45
  PWR 0.15: v25.65,72.45 25.65,67.03 26.9,65.78 27.98,65.78 28.95,64.8 28.95,56.05 27.4,54.5 27.4,47.1 27.65,46.85 v27.65,46.7
N$12
  Top 0.2: IC1.38 29.65,51.75 29.65,50.35 29.25,49.95 29.25,48.7 R24.2
N$16
  Top 0.2: IC1.5 21,64.64 21,65.99 X1.3 20.83,65.82 20.48,65.82 19.62,66.68 C31.2
N$18  (via drill 0.25 pad 0.5)
  Top 0.2: IC1.39 28.45,53.66 v28.45,53.95 | R23.2 28,49.65 v28.3,49.65
  PWR 0.2: v28.45,53.95 28.45,49.8 v28.3,49.65
N$19
  Top 0.2: C32.1 1.11,58.35 1.43,58.03 IC7.1
N$20
  Top 0.2: IC7.3 1.77,56.73 1.15,57.35 C32.2
N$21
  Top 0.2: IC1.6 21.78,63.15 20.71,63.15 X1.1 20.66,63.12 C1.2
N$22
  Top 0.2: IC7.5 1.27,55.42 1.2,55.35 C33.1
N$24
  Top 0.2: IC7.4 1.27,56.08 C33.2
N$26  (via drill 0.25)
  Top 0.15: R24.1 28.82,47.27 28.82,47.12 27.9,46.2 26.55,46.2 26.25,46.5 v26.25,46.7
  Top 0.2: LED2.G v24.55,72.45
  PWR 0.15: v24.55,72.45 24.55,67.28 26.7,65.13 27.64,65.13 28.35,64.42 28.35,56.3 26.8,54.75 26.8,47.35 26.25,46.8 v26.25,46.7
N$27
  Top 0.2: IC7.6 1.88,54.77 1.5,54.4 1.05,54.4 C2.1
N$28
  Top 0.2: IC7.2 3.12,57.38 3.25,57.5 C34.1
N$29
  Top 0.15: IC7.13 8.97,56.08 9.5,56.6 9.5,58.15 18.77,67.42 CON1.3
N$30
  Top 0.15: CON1.2 20.02,69.17 19.5,69.7 18.5,69.7 18.15,69.35 18.15,67.3 9.2,58.35 9.2,57 8.93,56.73 IC7.14
OVERCURRENT_FAULT  (via drill 0.25 pad 0.5)
  Top 0.15: RFB.1 5.68,58.97 6.2,58.45 7.57,58.45 7.8,58.67 7.8,60.6 8.3,61.1 R12.2 8.78,61.67 8.78,62.64 8.96,62.83 9.75,62.83 10.1,62.47 10.1,60.88 v10.32,60.65
  Top 0.152: RFB.1 5.75,59.3 5.75,60.55 5,61.3 5,62.3 4.95,62.35 IC6.4
  Top 0.2: IC1.22 21.85,54.75 21.85,55.8 20.35,57.3 19.2,57.3 v18.5,58
  PWR 0.15: v10.32,60.65 10.22,60.75 10.22,61.38 10.55,61.7 10.96,61.7 13.43,59.22 16.39,59.22 17.61,58 v18.5,58
PHASE_A  (via drill 0.25 pad 0.5)
  Top 0.5: R10.1 14.85,61.35 15.62,62.12 v15.62,62.58
  PWR 0.5: v15.62,62.58 15.15,63.05 15.15,64.75 14,65.9 CON3.8
PHASE_B
  Top 0.3: R8.1 13.99,54.56 11.82,52.4 11.23,52.4 9.73,50.9 9.73,46.59 10.4,45.92 10.4,44.5 10.4,44.34 11.75,42.99 CON4.3
PHASE_C  (via drill 0.25 pad 0.5)
  Top 0.3: v11.85,47.95 R7.1
  GND 0.3: CON5.3 10.22,18.43 10.22,21.23 11.3,22.3 11.3,31.7 15.1,35.5 15.1,45.5 12.65,47.95 v11.85,47.95
RC_PWM  (via drill 0.25 pad 0.5)
  Top 0.2: R14.2 23.95,65.3 25.6,63.65 25.6,63.4 23.35,61.15 23.35,60.2 22.9,59.75 21.9,59.75 20.8,58.65 20.63,58.65 IC1.14 19.28,60 v19.05,60
  Top 0.3: D6.A D5.C 24.93,65.92 24.57,65.92 24.1,65.45 R14.2
  PWR 0.15: v19.05,60 18.3,60.75 15.72,60.75 12.15,64.33 9.38,64.33 7.4,66.3 CON12.1
SENSE_A
  Top 0.2: R10.2 13.43,59.33 13.79,58.97 13.79,58.76 14.56,57.99 R11.2 C25.2 16.31,58.77 16.96,59.41 D4.A 19.16,59.41 IC1.15
SENSE_B
  Top 0.2: IC1.16 19.01,58.85 17.68,58.85 R9.2 C22.2 15.16,56.33 15.16,56.28 R8.2 15.46,56.45 14.32,57.59 D1.A
SENSE_C
  Top 0.2: IC1.17 19.09,55.52 17.22,55.52 14.75,53.05 D2.A 14.75,51.45 R15.2 C30.2 12.1,51.25 R7.2
SENSE_VIN
  Top 0.2: IC1.20 21,55.31 21,55.55 19.95,56.6 19.3,56.6 18.7,56 17.2,56 16,54.8 15.29,54.8 14.15,55.94 13.65,55.94 13.26,55.55 11.45,55.55 | 10.94,57.2 R5.1
  Top 0.3: 10.94,57.2 11.1,57.04 11.1,55.95 C15.2 11.45,55.55 R6.2 11.45,54.35 11.35,54.25 11.35,53.5 D3.A
SWCLK  (via drill 0.25 pad 0.5)
  Top 0.15: IC1.49 31.97,57.8 v31.9,57.8
  GND 0.2: v31.9,57.8 31.9,54.1 29.39,51.59 29.39,45.51 31.23,43.67 33.3,43.67 34.6,42.37 CON2.2
SWDIO  (via drill 0.25 pad 0.5)
  Top 0.15: v32.85,53.2 32.55,53.51 32.55,54.51 IC1.46
  GND 0.2: v32.85,53.2 31.55,53.2 29.84,51.49 29.84,45.66 31.39,44.11 CON2.1
USART1_RX  (via drill 0.25)
  Top 0.2: IC1.59 26.65,59.55 23.95,59.55 23.15,58.75 22.5,58.75 v22.4,58.85 | IC7.12 8.34,55.45 v9.3,55.45
  PWR 0.2: v9.3,55.45 10.8,55.45 13.3,57.95 15.31,57.95 17.21,56.05 20.49,56.05 21.85,57.41 21.85,58.4 22.3,58.85 v22.4,58.85
USART1_TX  (via drill 0.25)
  Top 0.2: IC1.58 26.96,59.15 24.1,59.15 23.1,58.15 v22.4,58.15 | IC7.11 9.28,54.77 v9.3,54.75
  PWR 0.2: v22.4,58.15 22.25,58 22.25,57.25 20.65,55.65 17.05,55.65 15.15,57.55 13.45,57.55 10.65,54.75 v9.3,54.75
VDC  (via drill 0.25 pad 0.5)
  Top 0.15: R5.2 12.1,58.97 12.07,58.97 v11.52,58.42
  Top 0.6: C101.P$2 9.6,42.8 9.6,41 C107.2 9.7,40.6 v10.3,40 10.73,39.56 IC101.2 | R103.2 RON100.1 v6.2,37.5
  GND 0.6: v10.3,40 9.8,40 7.3,37.5 v6.2,37.5
  Bottom 0.2: v11.52,58.42 2.67,58.42 2.65,58.4
  Bottom 0.5: v8.9,45.45 6.45,47.9 6.45,52.45 5.35,53.55 3.3,53.55 2.65,54.2 2.65,58.4 2.65,64.85 4.3,66.5 8.5,66.5 10.4,68.4 10.4,70.8 11.5,71.9 CON3.1
  other vias: 8.9,44.45 9.4,45.45 9.4,44.45 9.4,44.95 8.9,44.95
  pour Bottom (no thermals): 9.55,44.3 8.75,44.3 8.75,45.6 9.55,45.6
  pour Top (no thermals): 8.75,45.6 8.75,42.2 9.85,42.2 9.85,45.6
VDD_3V3  (via drill 0.25, 0.25 pad 0.5)
  Top 0.15: LED2.+ 24.55,68.75 24.95,68.35 25.95,68.35 26.85,67.45 26.85,66.25 v27.1,66.25 27.55,66.25 | C5.2 26.5,65.45 26.3,65.25 25.25,65.25 v25.15,65.15
  Top 0.152: C13.1 v11,3.2 | IC2.4 29.85,63.6 29.95,63.5 v30.76,63.5
  Top 0.2: 33.65,54.82 IC1.48 33.57,56.64 C8.1 | R3.1 C10.1 32.9,64 32.4,63.5 32.4,63.36 32.04,63 31.26,63 v30.76,63.5 | R2.1 28.45,65.65 28.35,65.65 27.9,66.1 27.7,66.1 27.55,66.25 | 18.73,61.15 C3.2 | IC1.19 v19.28,54.3 C6.2 | IC1.32 23.45,49.28 C7.2 | v13.8,52.4 D2.C | C4.2 | IC1.9 IC1.8 22.7,60.82 v22.7,60.3 | 8.35,58.06 IC7.16 | C5.2 26.8,65.5 26.8,64.43 IC1.64 | v33.05,54.55 33.38,54.55 33.65,54.82 | C9.1 33.72,54.75 33.65,54.82 | IC1.1 23.92,64.55 v23.8,64.55 | C4.2 17.83,60.25 | IC1.13 19.43,60.56 v19.43,60.78
  Top 0.3: 3.05,63.65 3.05,63.6 C16.2 | 32.5,34.6 31.8,33.9 31.8,32.6 31.2,32 25,32 24.5,31.5 C11.1 v23.7,31.4 | 8.35,58.06 C37.2 8.95,59.15 9.65,59.85 9.65,60.85 R12.1 R16.2 | 6.18,57.97 6.18,58.03 IC7.16
  Top 0.4: IC5.5 3.05,63.65 | 3.05,63.6 C14.1 | C16.2 3.1,61.5 4.14,60.45 IC6.5 4.7,60.45 5,60.15 5,58.4 5.43,57.97 6.18,57.97 6.2,57.97 6.2,53.8 7.6,52.4 v8.7,52.4
  Top 0.5: C27.2 33.92,34.6 IC3.5 32.5,34.6 32.5,37.7 | C7.2 v22.85,48.35 | C4.2 18.73,61.15 | D1.C 13.23,56.6 13.21,56.57 v14.12,56.57 | v8.7,52.4 v9.2,52.4 10,53.2 D3.C | D4.C 16.16,60.4 16.31,60.25 17.83,60.25 | C3.2 19.14,60.78 v19.43,60.78
  PWR 0.15: v25.15,65.15 24.55,64.55 v23.8,64.55
  PWR 0.3: v11,3.2 12.2,3.2 14.89,5.89 14.89,28.2 15.9,29.2 21.5,29.2 v23.7,31.4
  PWR 0.4: v30.76,63.5 33.05,63.5
  PWR 0.5: 14.54,54.3 v19.28,54.3 22.6,54.3 | v27.1,66.25 32.3,66.25 33.05,65.5 33.05,63.5 v33.05,54.55 31.75,54.55 29.1,51.9 29.1,45.3 | v8.7,52.4 v13.8,52.4 14.54,53.14 14.54,54.3 | 14.54,54.3 14.54,56.15 v14.12,56.57 | v30.35,39.85 30.35,42 29.1,43.25 29.1,45.3 | 29.1,45.3 25.85,45.3 22.85,48.3 v22.85,48.35 22.85,49.25 23.5,49.9 v23.5,53.4 22.6,54.3 | 22.6,54.3 22.6,56.42 23.07,56.9 23.07,59.92 v22.7,60.3 22.23,60.78 v19.43,60.78
  Bottom 0.152: 11,1.6 IC8.8 | IC11.8 IC11.7 25.8,53.58 IC11.6
  Bottom 0.2: v23.5,53.4 23.5,53.2 24.2,52.5 25.7,52.5 C29.1 25.8,52.4 25.8,53.58
  Bottom 0.3: v11,3.2 11,1.6 | v23.7,31.4 23.62,31.48 IC10.8 IC10.7
  other vias: 31.35,39.85 30.85,39.85 30.85,39.35 31.35,39.35 30.35,39.35 27.6,66.25
  pour PWR (no thermals): 30.2,39.2 31.5,39.2 31.5,40.05 30.2,40.05
  pour Top (no thermals): 27.8,66.5 26.3,66.5 26.3,65.25 26.9,65.25 26.9,66.05 27.8,66.05
  pour Top (no thermals): 30.2,37.65 32.35,37.65 32.35,35.7 35.3,35.7 35.3,37.35 34.1,37.35 31.4,40.05 30.2,40.05
VDD_5V  (via drill 0.25 pad 0.5)
  Top 0.3: IC3.3 31.1,32.7 31.3,32.9 31.3,34.3 31.05,34.55 30.3,34.55 IC3.1 | D6.C 25.77,67.71 v26.26,67.21
  Top 0.5: R1.1 28.75,37.85 29.85,36.75 30.07,36.75 C26.2 30.1,36.52 30.1,35.2 | IC3.1 30.1,34.75 30.1,35.2 | R201.2 30.1,35.2
  PWR 0.3: v26.26,67.21 26.63,66.85 34.25,66.85 CON11.1
  PWR 0.4: v29,39.75 29.05,39.7 29.05,38.75 29.7,38.1 32.7,38.1 33.3,38.7 33.3,41.9 29.8,45.41 29.8,51.55 32.15,53.9 33.4,53.9 33.7,54.2 33.7,65.2 CON11.1
  other vias: 29,40.75 29,39.25 29,40.25
  pour Top (no thermals): 26.5,36.75 26.5,37.4 26.75,37.65 29.15,37.65 29.15,42.4 26.4,42.4 26.4,36.75
  pour PWR (no thermals): 28.85,38.8 29.15,38.8 29.15,40.9 28.85,40.9
VDD_12V  (via drill 0.25 pad 0.5)
  Top 0.15: RFB102.2 5.65,34.15 6.15,33.65 6.15,32.35 CR100.1 | 20.75,37.1 L103.2
  Top 0.5: RFB102.2 v4.95,34.25
  Top 0.8: 20.5,35 21.75,33.75 23.75,33.75 C104.2 25.7,33.7 C201.2 | D101.A 18.75,38.8 v18.35,38.4
  Top 1: 20.75,37.1 20.5,36.85 20.5,35
  GND 0.5: CON3.6 15.3,66.45 15.3,65.25 14.45,64.4 9.8,64.4 6.5,61.1 6.5,53.7 7.35,52.85 7.35,50.35 11.75,45.95 CON4.1
  PWR 0.5: v17.85,39.4 17.85,42.5 14.35,46 12.85,46 CON4.1 | CON5.1 11.75,29.9 | 11.75,29.9 11.75,31.7 17.85,37.8 v17.85,38.4 | v4.95,34.25 4.95,31.8 6.85,29.9 11.75,29.9
  other vias: 18.35,39.4 18.35,38.9 17.85,38.9 18.85,39.4 18.85,38.9 18.85,38.4
  pour Top (no thermals): 25.92,35.2 25.92,34.72 25.52,34.32 25.52,32.92 26.52,32.92 26.52,35.2
  pour Top (no thermals): 22.15,32.45 17.7,32.45 17.7,39.55 22.15,39.55
  pour PWR (no thermals): 19,38.25 17.7,38.25 17.7,39.55 19,39.55
VREF
  Top 0.15: IC6.1 7.15,60.45 7.16,60.46 7.8,61.1 7.8,61.8 R16.1
  Top 0.152: R16.1 R17.1 | RFB.2 7.12,60.42 7.16,60.46

## Text on the board
tPlace: Valenok logic PCB | V0.1